# Allegro board DUMITRU ALEXANDRUS PCB EDITOR SCHEME .brd
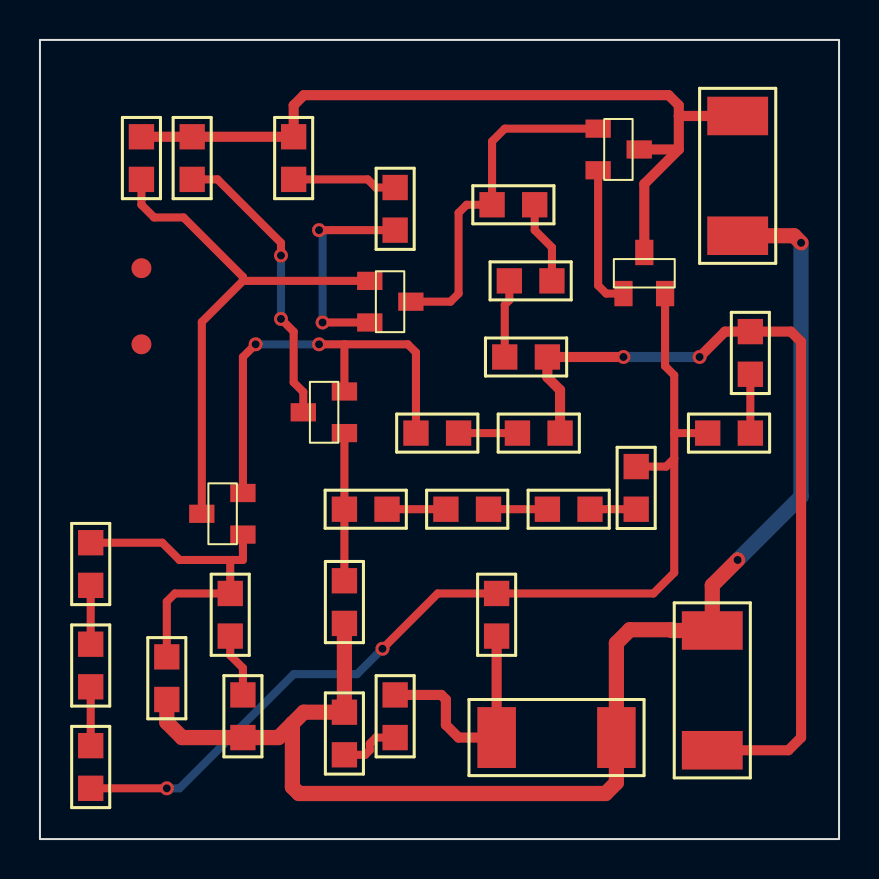
[diagram p0: board, top side]
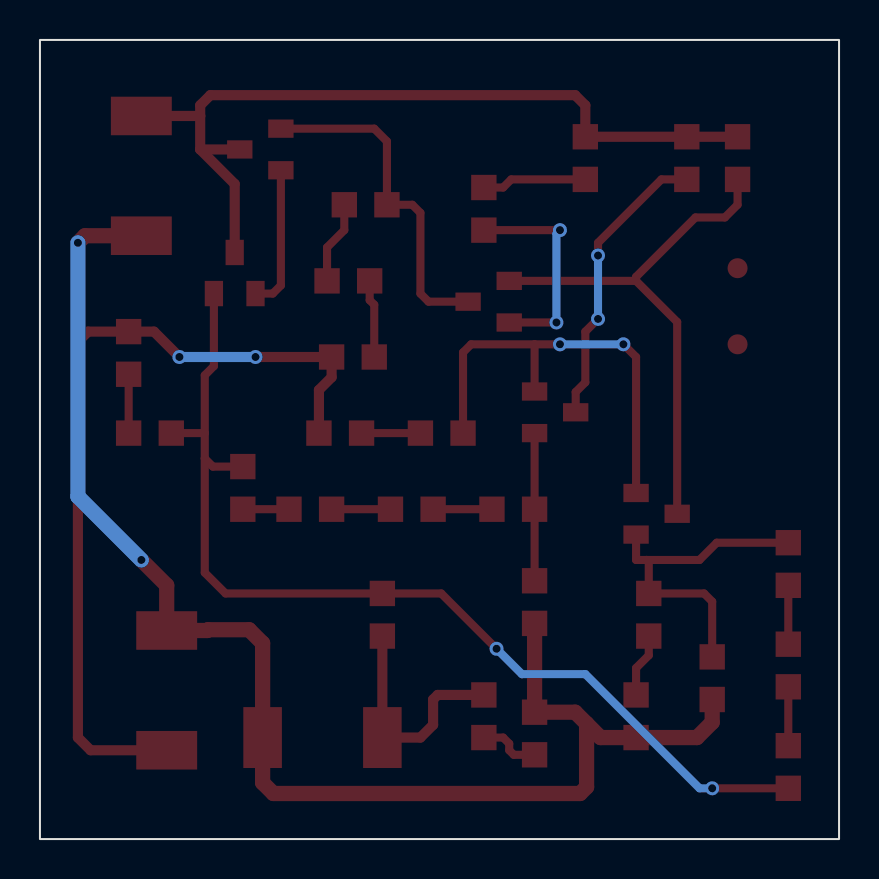
[diagram p1: board, bottom side, seen from below]

Outline 40 x 40 mm; copper layers: TOP, BOTTOM. Coordinates in mm from the lower left corner of the outline.
Outline path: rectangle 0,0 40,40

## Design rules (mm)
nets with their own width: min track width 0.406; nets N26441 N26445 N26529 N26571 N26607 N26701 N26745 N26773 N27689 N27789 N27965 N28453 N264291 N266470 N268210 N268611 N269051 N270770 N277350 N280951 N281291
nets with their own width: min track width 0.508; nets OUT V+ V-
nets with their own width: min track width 0.762; nets GND

## Placement (name value [footprint] x y rotation side)
C1  10u  [SMC0805]  29.84 16.51 90 top
C2  4.7n  [SMC0805]  2.54 2.54 90 top
C3  4.7n  [SMC0805]  6.35 6.99 90 top
C4  10u  [SMC0805]  22.86 10.16 90 top
J2  CON2  [SMR2512]  34.92 36.2 270 top
J3  CON2  [SMR2512]  33.66 4.45 90 top
J5  CON2  [SMR2512]  22.86 5.08 0 top
NOREF  -  [unnamed]  5.08 24.77 0 top
NOREF#2  -  [unnamed]  5.08 28.57 0 top
Q18  BC856B  [TO236AA]  16.51 27.94 180 top
Q19  BC846B  [TO236AA]  27.94 35.56 180 top
Q21  BC846B  [TO236AA]  10.16 15.24 0 top
Q22  BC846B  [TO236AA]  15.24 20.32 0 top
Q23  BC846B  [TO236AA]  29.21 27.3 270 top
R1  51  [SMR0805]  12.7 33.02 90 top
R3  1k  [SMR0805]  7.62 33.02 90 top
R6  10k  [SMR0805]  15.24 10.79 90 top
R7  3.3k  [SMR0805]  24.77 31.75 180 top
R8  680  [SMR0805]  35.56 20.32 180 top
R9  15k  [SMR0805]  15.24 16.51 0 top
R11  2.2k  [SMR0805]  2.54 12.7 90 top
R12  2.2k  [SMR0805]  10.16 5.08 90 top
R13  330  [SMR0805]  15.24 6.35 270 top
R14  2.2k  [SMR0805]  26.04 20.32 180 top
R15  510  [SMR0805]  17.78 30.48 90 top
R16  2.7k  [SMR0805]  20.32 16.51 0 top
R17  3.3k  [SMR0805]  25.4 16.51 0 top
R18  22  [SMR0805]  35.56 25.4 270 top
R19  22  [SMR0805]  17.78 5.08 90 top
R20  330  [SMR0805]  23.5 27.94 0 top
R21  51  [SMR0805]  25.4 24.13 180 top
R22  100  [SMR0805]  20.95 20.32 180 top
R23  68  [SMR0805]  9.53 10.16 90 top
R24  68  [SMR0805]  2.54 7.62 90 top
R*  1k  [SMR0805]  5.08 33.02 90 top

## Library data of the parts
C1-C4 = C
J2 J3 J5 = CON2
Q18 = BC856B
Q19 Q21-Q23 = BC846B
R1 R3 R6-R9 R11-R24 R* = R

## Footprints (pads in the part's own frame, mm; a bottom-side part is the same pattern mirrored in y, then rotated)
SMC0805
  rect 1.27x1.27 smd: 1(0,0) 2(2.134,0)
SMR0805
  rect 1.27x1.27 smd: 1(0,0) 2(2.134,0)
SMR2512
  rect 1.93x3.048 smd: 1(0,0) 2(5.994,0)
TO236AA
  rect 1.27x0.914 smd: 1(0,0) 2(0,2.083) 3(-2.057,1.041)
unnamed
  round 1 smd: (0,0)

## Nets
GND: C3.1 J2.2 J3.2 J5.2 R6.1 R12.1 R13.1
OUT: C4.1 J5.1 R19.2
V+: J2.1 Q19.3 Q23.3 R1.2 R3.2 R*.2
V-: J3.1 R14.1 R18.1 R21.1
N26441: Q18.1 Q21.3 R*.1
N26445: Q22.3 R3.1
N26529: Q18.3 Q19.1 R7.2
N26571: Q19.2(E) Q23.1
N26607: C1.2 C2.1 C4.2 Q23.2(E) R8.2
N26701: Q22.1 R6.2 R9.1
N26745: C3.2 Q21.1 R11.2 R23.2
N26773: Q21.2(E) Q22.2(E) R22.2
N27689: Q18.2(E) R15.1
N27789: C1.1 R17.2
N27965: R13.2 R19.1
N28453: C2.2 R24.1
N264291: R1.1 R15.2
N266470: R9.2 R16.1
N268210: R12.2 R23.1
N268611: R8.1 R18.2
N269051: R11.1 R24.2
N270770: R14.2 R22.1
N277350: R16.2 R17.1
N280951: R7.1 R20.2
N281291: R20.1 R21.2

## Via types
v1: diameter 0.7, hole 0.4, TOP to BOTTOM, 12 vias

## Routing (per net, layer and track width the routed paths; a pad name or vN(x,y) marks a point on that pad's centre or on a via; arc(x,y) is an arc through that point)
GND: length 71.7
  TOP w0.762: J2.2 37.74,30.2 v1(38.1,29.84) ; 12.64,5.78 13.21,6.35 R13.1 R6.1 ; 12.64,5.78 11.94,5.08 R12.1 7.11,5.08 6.35,5.84 C3.1 ; 12.64,5.78 12.64,2.6 12.96,2.28 28.32,2.28 28.85,2.82 J5.2 28.85,9.8 29.53,10.48 31.58,10.48 31.62,10.44 J3.2 33.66,12.7 v1(34.92,13.97)
  BOTTOM w0.762: v1(38.1,29.84) 38.1,17.14 v1(34.92,13.97)
OUT: length 11.8
  TOP w0.508: R19.2 20.09,7.21 20.32,6.99 20.32,5.71 20.95,5.08 J5.1 C4.1
V+: length 41.9
  TOP w0.508: 31.98,34.52 30.25,32.79 Q23.3 ; 31.98,34.52 31.98,36.2 ; 31.98,34.52 Q19.3 ; J2.1 31.98,36.2 ; 31.98,36.2 31.98,36.73 31.47,37.24 13.21,37.24 12.7,36.73 R1.2 R3.2 R*.2
V-: length 42
  TOP w0.508: v1(33.02,24.13) 34.29,25.4 R18.1 37.59,25.4 38.1,24.89 38.1,5.08 37.47,4.45 J3.1 ; v1(29.21,24.13) R21.1 25.4,23.11 26.04,22.48 R14.1
  BOTTOM w0.508: v1(29.21,24.13) v1(33.02,24.13)
N26441: length 26.9
  TOP w0.406: Q21.3 8.1,25.88 10.16,27.94 ; 10.16,27.94 10.16,28.14 7.19,31.11 5.71,31.11 5.08,31.75 R*.1 ; 10.16,27.94 Q18.1
N26445: length 14.7
  TOP w0.406: R3.1 8.89,33.02 12.06,29.84 v1(12.06,29.21) ; v1(12.06,26.04) 12.7,25.4 12.7,22.86 13.18,22.38 Q22.3
  BOTTOM w0.406: v1(12.06,26.04) v1(12.06,29.21)
N26529: length 17.2
  TOP w0.406: Q18.3 20.55,26.9 20.95,27.3 20.95,31.34 21.36,31.75 R7.2 22.63,34.92 23.27,35.56 Q19.1
N26571: length 7.2
  TOP w0.406: Q19.2 27.94,27.71 28.35,27.3 Q23.1
N26607: length 51.6
  TOP w0.406: 31.75,20.32 31.75,23.22 31.29,23.67 Q23.2 ; 31.75,20.32 R8.2 ; 31.75,20.32 31.75,19.05 ; 31.75,19.05 31.75,13.34 30.71,12.29 C4.2 19.91,12.29 v1(17.14,9.53) ; 31.75,19.05 31.34,18.64 C1.2 ; v1(6.35,2.54) C2.1
  BOTTOM w0.406: v1(17.14,9.53) 15.88,8.26 12.7,8.26 6.99,2.54 v1(6.35,2.54)
N26701: length 7.4
  TOP w0.406: R6.2 R9.1 Q22.1
N26745: length 17.1
  TOP w0.406: 9.63,13.97 10.16,13.97 Q21.1 ; 9.63,13.97 9.53,13.86 R23.2 6.76,12.29 6.35,11.89 C3.2 ; 9.63,13.97 6.99,13.97 6.12,14.83 R11.2
N26773: length 22.3
  TOP w0.406: v1(13.97,24.77) 15.24,24.77 ; 15.24,24.77 Q22.2 ; 15.24,24.77 18.41,24.77 18.82,24.36 R22.2 ; v1(10.79,24.77) 10.16,24.13 Q21.2
  BOTTOM w0.406: v1(13.97,24.77) v1(10.79,24.77)
N27689: length 10.9
  TOP w0.406: v1(14.15,25.86) Q18.2 ; v1(13.97,30.48) R15.1
  BOTTOM w0.406: v1(13.97,30.48) 14.15,30.3 v1(14.15,25.86)
N27789: length 2.3
  TOP w0.406: C1.1 R17.2
N27965: length 3.1
  TOP w0.406: R19.1 16.81,5.08 16.51,4.78 16.51,4.45 16.28,4.22 R13.2
N28453: length 2.9
  TOP w0.406: C2.2 R24.1
N264291: length 5.2
  TOP w0.406: R1.1 16.41,33.02 16.81,32.61 R15.2
N266470: length 2.9
  TOP w0.406: R16.1 R9.2
N268210: length 3.2
  TOP w0.406: R12.2 10.16,8.56 9.53,9.19 R23.1
N268611: length 2.9
  TOP w0.406: R8.1 R18.2
N269051: length 2.9
  TOP w0.406: R24.2 R11.1
N270770: length 2.9
  TOP w0.406: R22.1 R14.2
N277350: length 2.9
  TOP w0.406: R16.2 R17.1
N280951: length 4.2
  TOP w0.406: R20.2 25.63,29.62 24.77,30.48 R7.1
N281291: length 3.9
  TOP w0.406: R20.1 23.5,26.97 23.27,26.75 R21.2

## Text on the board
Ref Des/Silkscreen Top: Dumitru Alexandru 435C | PDCE 2021-2022 | R2
XSECTION_CHART: *  SURFACE - AIR 0 MIL | L1 TOP CONDUCTOR - COPPER 0.72 MIL | *  DIELECTRIC - FR-4 57.63 MIL | L2 BOTTOM CONDUCTOR - COPPER 0.72 MIL | DESIGN CROSS SECTION CHART | ___________________________ | TOTAL THICKNESS 59.07 MIL | 1-2
NCLEGEND-1-2: FIGURE | FINISHED_SIZE | 15.75 | DRILL CHART: TOP to BOTTOM | ALL UNITS ARE IN MILS | PLATED | QTY | 12
